# EAGLE board ESP8266Ring (EAGLE 8.3.2)
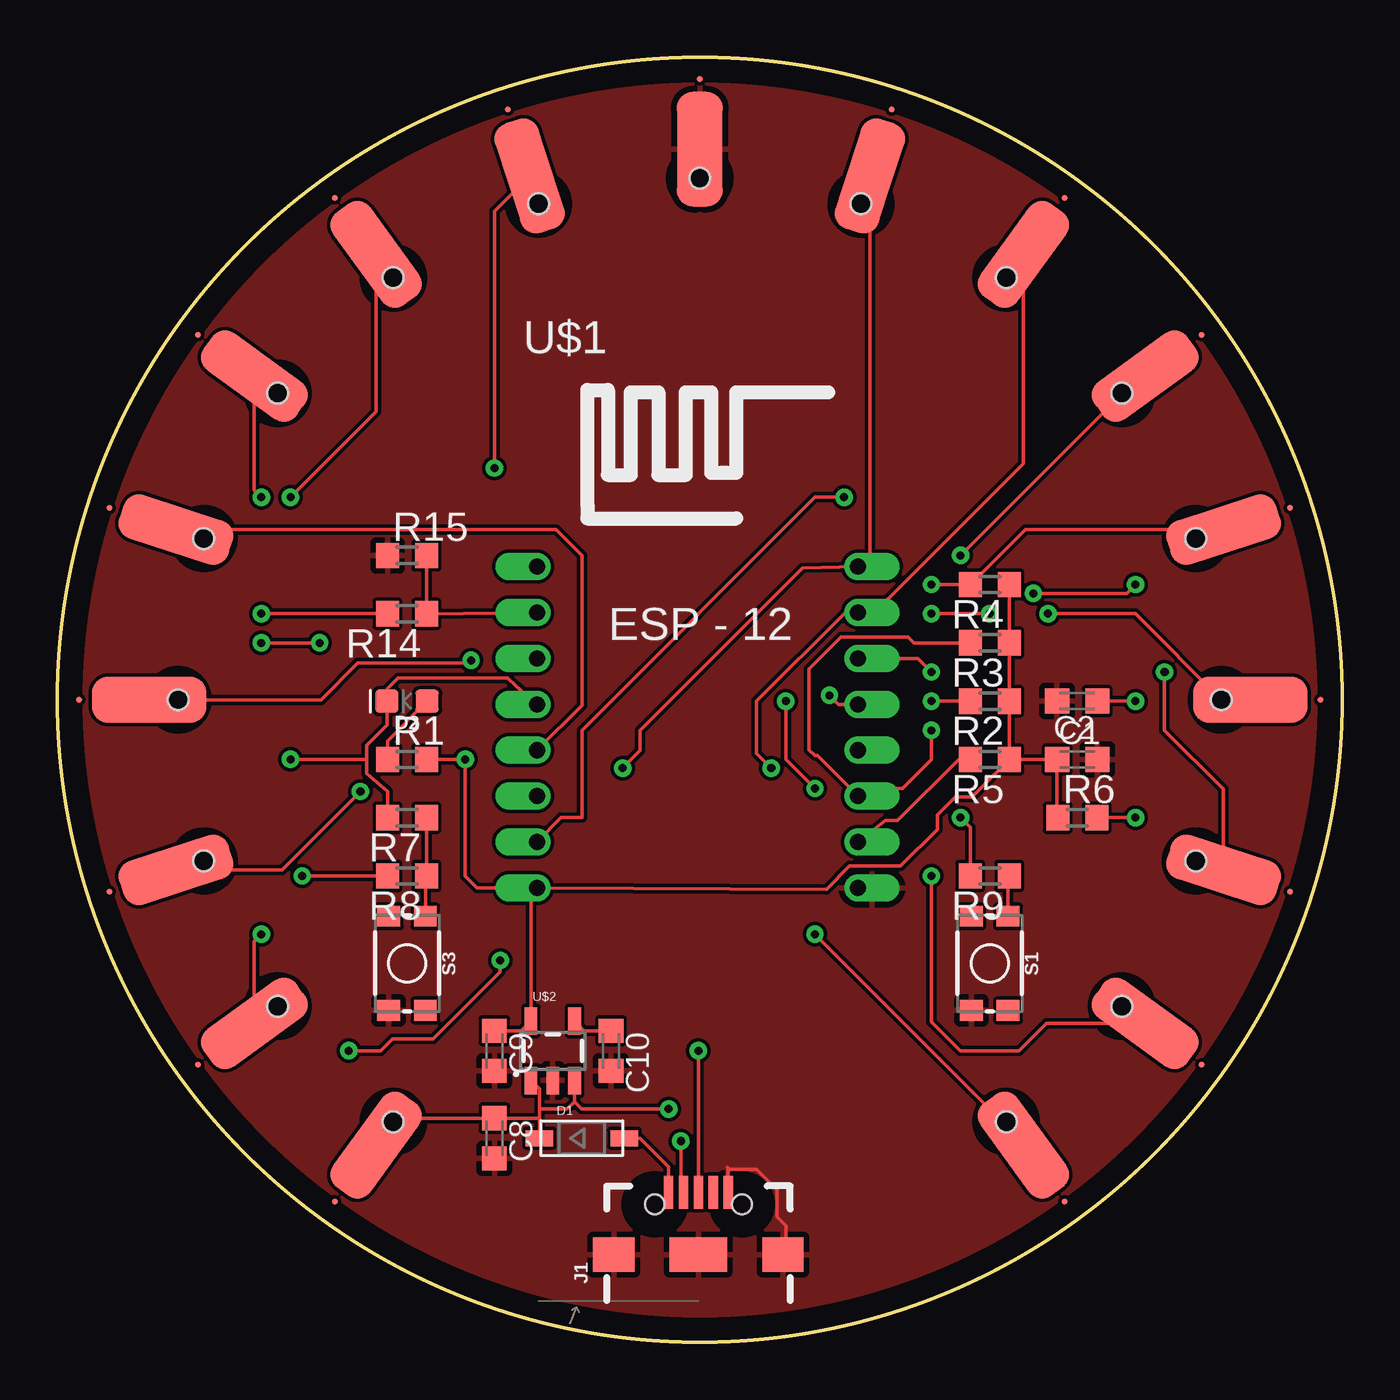
[diagram p0: board, top side]
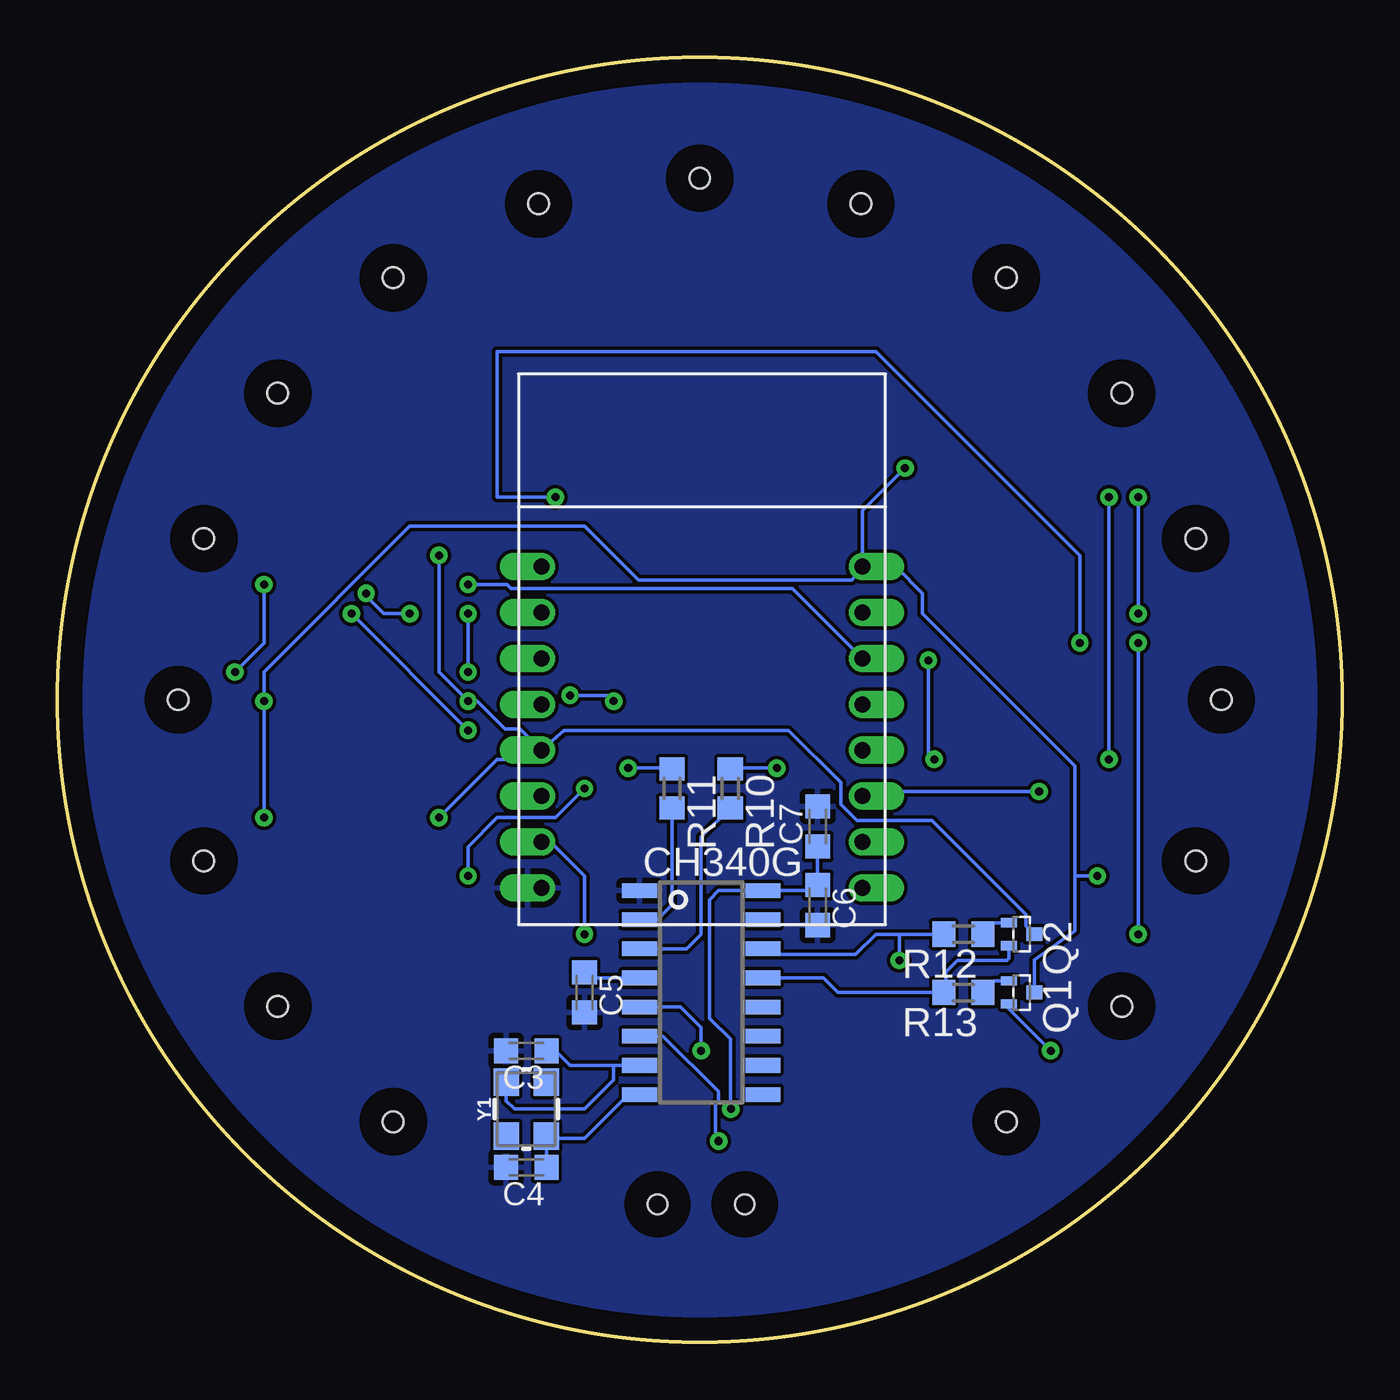
[diagram p1: board, bottom side, seen from below]

Size 56 x 56 mm. Coordinates in mm from the lower left corner, seen from the top.
Outline: circle at 28,28 radius 28
Copper layers (1*16): Top 0.035mm / dielectric 1.5mm / Bottom 0.035mm
Design rules "default *": minimum track width 6mil, minimum drill 0.35mm, track to track 6mil, track to pad 6mil, pad to pad 6mil, via to via 6mil, smd to smd 6mil, copper to edge 40mil, drill to drill 6mil, minimum pad ring 10mil, minimum via ring 8mil, stop-mask expansion 4mil, vias tented up to drill 0mil, thermal gap 10mil

## Footprints (pad centres in the part's own frame; a part is rotated, then mirrored left to right if it is on the bottom)
C0603K = smd 1.05 x 1.08: 1 -0.875,0; 2 0.875,0
SOD-123 = smd 1.2 x 0.7: A 1.85,0; C -1.85,0
LED-0603 = smd 1 x 1: A -0.877,0; C 0.877,0
USB-B-MICRO-SMD_RED_PASTE = smd 1.45 x 0.4: D+ 2.725,0; D- 2.725,0.65; GND 2.725,-1.3; ID 2.725,-0.65; VBUS 2.725,1.3 | smd 1.5 x 1.8: SHIELD1 0,3.685; SHIELD2 0,-3.685 | smd 1.5 x 2.5: SHIELD3 0,0 | hole 0.85: 2.2,1.9; 2.2,-1.9
EMT3 = smd 0.4 x 0.7: B -0.5,-0.55; E 0.5,-0.55 | smd 0.6 x 0.7: C 0,0.55
R0603 = smd 1 x 1.1: 1 -0.85,0; 2 0.85,0
TACTILE_SWITCH_SMD_4.6X2.8MM = smd 0.9 x 1: 1 -2.05,-0.8; 2 2.05,-0.8; 3 2.05,0.8; 4 -2.05,0.8
ESP12 = drill 0.7 offset: ADC -7.1,3.8; CH_PD -7.1,1.8; GND 6.9,-8.2; GPIO0 6.9,-2.2; GPIO2 6.9,-4.2; GPIO4 6.9,1.8; GPIO5 6.9,-0.2; GPIO12 -7.1,-4.2; GPIO13 -7.1,-6.2; GPIO14 -7.1,-2.2; GPIO15 6.9,-6.2; GPIO16 -7.1,-0.2; RESET -7.1,5.8; RX 6.9,3.8; TX 6.9,5.8; VCC -7.1,-8.2
SOT23-5 = smd 0.55 x 1.2: 1 -0.95,-1.3; 2 0,-1.3; 3 0.95,-1.3; 4 0.95,1.3; 5 -0.95,1.3
SOIC16 = smd 0.635 x 1.524: 1 -4.445,-2.695; 2 -3.175,-2.695; 3 -1.905,-2.695; 4 -0.635,-2.695; 5 0.635,-2.695; 6 1.905,-2.695; 7 3.175,-2.695; 8 4.445,-2.695; 9 4.445,2.695; 10 3.175,2.695; 11 1.905,2.695; 12 0.635,2.695; 13 -0.635,2.695; 14 -1.905,2.695; 15 -3.175,2.695; 16 -4.445,2.695
ROUNDPAD = smd 0.254 x 0.254: BP 0,-3.048 | smd 2 x 5: TP 0,0 | hole 0.9: 0,1.27
CRYSTAL-SMD-3.2X2.5MM = smd 1.2 x 1.1: 1 -1.175,-0.875; 2 1.175,-0.875; 3 1.175,0.875; 4 -1.175,0.875

## Placement (x,y rotation side)
C1  100uF  [C0603K]  44.45,25.4 0 top
C2  470pF  [C0603K]  44.45,27.94 180 top
C3  22pF  [C0603K]  35.56,12.7 180 bottom
C4  22pF  [C0603K]  35.56,7.62 180 bottom
C5  100nF  [C0603K]  33.02,15.24 270 bottom
C6  100nF  [C0603K]  22.86,19.05 270 bottom
C7  10nF  [C0603K]  22.86,22.48 90 bottom
C8  1uF  [C0603K]  19.05,8.89 270 top
C9  10uF  [C0603K]  19.05,12.7 270 top
C10  470pF  [C0603K]  24.13,12.7 270 top
D1  [SOD-123]  22.86,8.89 0 top
D2  BLUE  [LED-0603]  15.24,27.94 180 top
J1  [USB-B-MICRO-SMD_RED_PASTE]  27.94,3.81 90 top
Q1  2SC4726TL  [EMT3]  13.97,15.24 270 bottom
Q2  2SC4726TL  [EMT3]  13.97,17.78 270 bottom
R1  [R0603]  15.24,25.4 0 top
R2  12K  [R0603]  40.64,27.94 180 top
R3  12K  [R0603]  40.64,30.48 180 top
R4  12K  [R0603]  40.64,33.02 180 top
R5  12K  [R0603]  40.64,25.4 180 top
R6  12k  [R0603]  44.45,22.86 0 top
R7  470  [R0603]  15.24,22.86 180 top
R8  0  [R0603]  15.24,20.32 180 top
R9  470  [R0603]  40.64,20.32 180 top
R10  470  [R0603]  26.67,24.13 270 bottom
R11  470  [R0603]  29.21,24.13 270 bottom
R12  12K  [R0603]  16.51,17.78 180 bottom
R13  12K  [R0603]  16.51,15.24 180 bottom
R14  220K(1%)  [R0603]  15.24,31.75 180 top
R15  100K(1%)  [R0603]  15.24,34.29 0 top
S1  [TACTILE_SWITCH_SMD_4.6X2.8MM]  40.64,16.51 270 top
S3  [TACTILE_SWITCH_SMD_4.6X2.8MM]  15.24,16.51 270 top
U$1  ESP12  [ESP12]  28,28 0 top
U$2  SPX3819M5_3_3  [SOT23-5]  21.59,12.7 0 top
U$3  CH340G  [SOIC16]  27.94,15.24 270 bottom
U$4  ROUNDPADROUNDPAD  [ROUNDPAD]  47.42,42.11 126 top
U$5  ROUNDPADROUNDPAD  [ROUNDPAD]  52,28 90 top
U$6  ROUNDPADROUNDPAD  [ROUNDPAD]  50.83,20.58 72 top
U$7  ROUNDPADROUNDPAD  [ROUNDPAD]  47.42,13.89 54 top
U$8  ROUNDPADROUNDPAD  [ROUNDPAD]  5.17,20.58 288 top
U$9  ROUNDPADROUNDPAD  [ROUNDPAD]  8.58,13.89 306 top
U$10  ROUNDPADROUNDPAD  [ROUNDPAD]  5.17,35.42 252 top
U$11  ROUNDPADROUNDPAD  [ROUNDPAD]  13.89,47.42 216 top
U$12  ROUNDPADROUNDPAD  [ROUNDPAD]  35.42,50.83 162 top
U$13  ROUNDPADROUNDPAD  [ROUNDPAD]  42.11,47.42 144 top
U$14  ROUNDPADROUNDPAD  [ROUNDPAD]  8.58,42.11 234 top
U$15  ROUNDPADROUNDPAD  [ROUNDPAD]  50.83,35.42 108 top
U$16  ROUNDPADROUNDPAD  [ROUNDPAD]  42.11,8.58 36 top
U$17  ROUNDPADROUNDPAD  [ROUNDPAD]  28,52 180 top
U$18  ROUNDPADROUNDPAD  [ROUNDPAD]  4,28 270 top
U$19  ROUNDPADROUNDPAD  [ROUNDPAD]  20.58,50.83 198 top
U$20  ROUNDPADROUNDPAD  [ROUNDPAD]  13.89,8.58 324 top
Y1  12MHz  [CRYSTAL-SMD-3.2X2.5MM]  35.56,10.16 90 bottom

## Library data of the parts
C1-C10 R1-R15 = resistor
D1 = adafruit
D2 = SparkFun-LED; PROD_ID: DIO-08575
J1 = SparkFun-Connectors; PROD_ID: CONN-11752
Q1 Q2 = transistor-small-signal
S1 S3 = SparkFun-Switches; PROD_ID: SWCH-13065
U$1 = esp8266modules
U$2 = SparkFun-IC-Power; PROD_ID: VREG-13321
U$3 = ch340g
U$4-U$20 = RoundPad
Y1 = SparkFun-Clocks

## Nets
3.3V: C1.1 C9.1 R1.2 R2.1 R3.1 R4.1 R5.1 R6.1 U$1.VCC U$2.5 U$18.TP
5V: C6.1 C7.1 C8.1 D1.C U$2.1 U$2.3 U$3.16 U$20.TP
ADC: R14.1 R15.2 U$1.ADC
ADC_EX: R14.2 U$14.TP
EN: R4.2 U$1.CH_PD U$15.TP
GND: C1.2 C2.2 C3.2 C4.2 C5.2 C6.2 C7.2 C8.2 C9.2 C10.2 J1.GND J1.SHIELD1 J1.SHIELD2 J1.SHIELD3 R15.1 S1.2 S3.2 U$1.GND U$2.2 U$3.1 U$17.TP
GPIO0: Q2.C R2.2 R9.2 U$1.GPIO0 U$4.TP
GPIO2: R3.2 U$1.GPIO2 U$5.TP
GPIO4: U$1.GPIO4 U$6.TP
GPIO5: U$1.GPIO5 U$7.TP
GPIO12: U$1.GPIO12 U$8.TP
GPIO13: U$1.GPIO13 U$9.TP
GPIO14: U$1.GPIO14 U$10.TP
GPIO15: R5.2 U$1.GPIO15 U$16.TP
GPIO16: D2.C R7.2 U$1.GPIO16 U$11.TP
N$1: D2.A R1.1
N$2: R9.1 S1.4
N$3: R7.1 R8.1 S3.4
N$4: J1.D- U$3.6
N$5: J1.D+ U$3.5
N$6: R10.2 U$3.3
N$7: R11.2 U$3.2
N$8: C5.1 U$3.4
N$9: Q1.B R13.1
N$10: Q2.B R12.1
N$11: Q2.E R13.2 U$3.13
N$12: Q1.E R12.2 U$3.14
N$13: C10.1 U$2.4
NRST: C2.1 Q1.C R6.2 R8.2 U$1.RESET U$19.TP
RXD0: R11.1 U$1.RX U$13.TP
TXD0: R10.1 U$1.TX U$12.TP
VDDUSB: D1.A J1.VBUS
XI: C3.1 U$3.7 Y1.3
XO: C4.1 U$3.8 Y1.1

## Tracks (layer width: path | path; a pad name or v marks a point on that pad's centre or on a via)
3.3V  (via drill 0.35)
  Top 0.152: C9.1 20.21,13.57 U$2.5 20.64,19.54 U$1.VCC | R5.1 39.86,23.77 39.15,23.77 38.35,22.98 38.35,22.35 36.75,20.75 34.53,20.75 33.52,19.74 U$1.VCC | R5.1 C1.1 43.58,22.89 R6.1 | R5.1 R2.1 R3.1 R4.1 | U$18.TP 11.49,28 13.08,29.59 18.03,29.59 v18.03,29.72 | R1.2 v17.78,25.4 17.78,20.32 18.3,19.8 U$1.VCC
  Bottom 0.152: v18.03,29.72 18.03,25.65 v17.78,25.4
5V  (via drill 0.35)
  Top 0.152: 21.01,9.78 D1.C | 21.01,10.16 21.01,9.78 | 21.01,10.16 21.01,11.03 U$2.1 | 21.01,9.78 21,9.77 C8.1 15.07,9.77 U$20.TP | 22.54,10.47 U$2.3 | 22.54,10.47 22.23,10.16 21.01,10.16 | v26.65,10.16 22.86,10.16 22.54,10.47
  Bottom 0.152: C7.1 C6.1 23.1,19.68 U$3.16 27.18,19.68 27.58,19.28 27.58,14.12 26.67,13.21 26.67,10.16 v26.65,10.16
ADC
  Top 0.152: U$1.ADC R14.1 R15.2
ADC_EX  (via drill 0.35)
  Top 0.152: U$14.TP 8.58,37.14 v8.89,36.83 | v8.89,31.75 R14.2
  Bottom 0.152: v8.89,36.83 v8.89,31.75
EN  (via drill 0.35)
  Top 0.152: v38.1,33.02 R4.2 42.19,35.42 U$15.TP
  Bottom 0.152: v38.1,33.02 36.4,33.02 36.23,32.86 23.96,32.86 U$1.CH_PD
GND
  Top 0.152: J1.GND 29.24,7.59 | 29.24,7.59 29.21,7.62 | 29.24,7.59 29.3,7.53 30.47,7.53 31.36,6.64 31.36,5.47 31.75,5.08 31.75,3.94 J1.SHIELD2
  pour Top: 0,55.88 55.88,55.88 55.88,0 0,0
  pour Bottom: 0,0 55.88,0 55.88,55.88 0,55.88
GPIO0  (via drill 0.35)
  Top 0.152: R9.2 39.79,22.44 v39.37,22.86 | R2.2 v38.1,27.94 | U$4.TP 47.19,42.11 v39.37,34.29
  Bottom 0.152: Q2.C 13.79,18.15 13.79,18.64 17.88,22.73 21.15,22.73 21.85,23.43 21.85,24.39 24.13,26.67 33.91,26.67 U$1.GPIO0 | v39.37,22.86 36.83,25.4 35.18,25.4 U$1.GPIO0 | U$1.GPIO0 35.83,26.73 36.49,26.73 37.7,27.94 v38.1,27.94 39.37,29.21 v39.37,34.29
GPIO2  (via drill 0.35)
  Top 0.152: U$5.TP 50.74,28 46.99,31.75 v43.18,31.75 | v38.1,26.67 38.1,25.4 36.83,24.13 35.23,24.13 U$1.GPIO2 33.14,25.56 33.02,25.56 32.77,25.81 32.77,29.34 34.16,30.73 37.08,30.73 37.34,30.48 R3.2
  Bottom 0.152: v43.18,31.75 v38.1,26.67
GPIO4  (via drill 0.35)
  Top 0.152: U$1.GPIO4 37.51,29.8 v38.1,29.21 | v38.1,31.75 v40.64,31.75 | v42.55,32.64 46.61,32.64 v46.99,33.02 | U$6.TP 50.83,24.11 48.26,26.67 v48.26,29.21
  Bottom 0.152: v38.1,29.21 v38.1,31.75 | v40.64,31.75 41.78,31.75 42.55,32.51 v42.55,32.64 | v46.99,33.02 46.99,30.48 v48.26,29.21
GPIO5  (via drill 0.35)
  Top 0.152: U$7.TP 43.1,13.89 41.91,12.7 39.37,12.7 38.1,13.97 v38.1,20.32 | U$1.GPIO5 34.05,27.8 v33.66,28.19 | v31.75,27.94 31.75,25.4 v33.02,24.13
  Bottom 0.152: v33.66,28.19 32,28.19 v31.75,27.94 | v38.1,20.32 38.1,21.59 36.83,22.86 34.29,22.86 v33.02,24.13
GPIO12  (via drill 0.35)
  Top 0.152: U$8.TP 9.79,20.58 v13.21,24
  Bottom 0.152: v13.21,24 20.7,24 U$1.GPIO12
GPIO13  (via drill 0.35)
  Top 0.152: U$9.TP 8.58,17.47 v8.89,17.78 | v34.29,36.83 33.02,36.83 22.86,26.67 22.86,22.86 21.96,22.86 U$1.GPIO13 | v11.43,30.48 v8.89,30.48
  Bottom 0.152: v11.43,30.48 11.43,34.29 20.32,43.18 36.83,43.18 36.83,36.83 v34.29,36.83 | v8.89,30.48 v8.89,17.78
GPIO14
  Top 0.152: U$10.TP 21.73,35.42 22.86,34.29 22.86,27.76 U$1.GPIO14
GPIO15  (via drill 0.35)
  Top 0.152: U$1.GPIO15 36.08,22.73 36.62,22.73 39.29,25.4 R5.2 | U$16.TP 42.11,8.69 v33.02,17.78
  Bottom 0.152: U$1.GPIO15 34.5,21.8 33.02,20.32 v33.02,17.78
GPIO16  (via drill 0.35)
  Top 0.152: 13.48,25.4 13.48,24.79 14.39,24.01 R7.2 | 13.48,25.4 13.48,26.01 14.36,26.89 D2.C 14.36,28.46 14.86,28.96 19.62,28.96 19.99,28.59 U$1.GPIO16 | U$11.TP 13.89,40.56 v10.16,36.83 | v10.16,25.4 13.48,25.4
  Bottom 0.152: v10.16,36.83 v10.16,25.4
N$1
  Top 0.152: R1.1 14.39,26.21 D2.A
N$2
  Top 0.152: S1.4 41.44,20.27 R9.1
N$3
  Top 0.152: S3.4 16.04,20.27 R8.1 R7.1
N$4  (via drill 0.35)
  Top 0.152: v27.18,8.76 27.18,7.02 27.29,6.91 J1.D-
  Bottom 0.152: U$3.6 29.59,13.34 27.18,10.92 27.18,10.54 27.3,10.41 27.3,8.89 v27.18,8.76
N$5  (via drill 0.35)
  Top 0.152: v27.94,12.7 J1.D+
  Bottom 0.152: U$3.5 28.83,14.61 27.94,13.72 v27.94,12.7
N$6
  Bottom 0.152: U$3.3 28.57,17.14 27.94,17.78 27.94,22.01 R10.2
N$7
  Bottom 0.152: U$3.2 29.84,18.41 29.21,19.05 R11.2
N$8
  Bottom 0.152: U$3.4 32.78,15.88 C5.1
N$9
  Bottom 0.152: Q1.B 15.16,15.74 R13.1
N$10
  Bottom 0.152: Q2.B 15.16,18.28 R12.1
N$11
  Bottom 0.152: U$3.13 22.61,15.88 21.97,15.24 R13.2 17.27,15.33 17.27,16.13 16.76,16.64 14.61,16.64 14.52,16.72 Q2.E
N$12  (via drill 0.35)
  Top 0.152: v12.7,12.7 14.1,12.7 14.61,13.21 16.38,13.21 19.3,16.13 v19.3,16.64
  Bottom 0.152: 19.3,17.78 R12.2 | 19.3,17.78 20.32,17.78 21.21,16.89 24.99,16.89 U$3.14 | Q1.E 14.52,14.52 v12.7,12.7 | v19.3,16.64 19.3,17.78
N$13
  Top 0.152: C10.1 22.96,13.57 U$2.4
NRST  (via drill 0.35)
  Top 0.152: R8.2 v10.67,20.32 | R6.2 v46.99,22.86 | C2.1 v46.99,27.94 | v19.05,38.1 19.05,49.29 U$19.TP
  Bottom 0.152: Q1.C 13.42,16.66 11.65,17.93 11.65,20.32 | v10.67,20.32 11.65,20.32 | v46.99,22.86 v46.99,27.94 46.99,29.21 40.64,35.56 33.02,35.56 30.67,33.21 21.37,33.21 U$1.RESET | U$1.RESET 20.9,36.25 v19.05,38.1 | U$1.RESET 20.88,33.78 19.43,33.78 18.29,32.64 18.29,31.75 11.65,25.11 11.65,20.32
RXD0  (via drill 0.35)
  Top 0.152: v31.11,25.02 30.48,25.65 30.48,27.94 34.28,31.74 34.29,31.74 34.35,31.8 U$1.RX 35.61,31.8 42.11,38.3 U$13.TP
  Bottom 0.152: v31.11,25.02 29.25,25.02 R11.1
TXD0  (via drill 0.35)
  Top 0.152: v24.64,25.02 25.4,25.78 25.4,26.67 32.47,33.74 U$1.TX 35.42,34.32 U$12.TP
  Bottom 0.152: v24.64,25.02 26.63,25.02 R10.1
VDDUSB
  Top 0.152: J1.VBUS 26.64,7.65 25.4,8.89 D1.A
XI
  Bottom 0.152: 31.75,12.06 U$3.7 | 31.75,12.06 33.66,12.06 34.29,12.7 C3.1 | Y1.3 36.44,10.53 36.07,10.16 33.02,10.16 31.75,11.43 31.75,12.06
XO
  Bottom 0.152: U$3.8 31.11,10.79 33.02,8.89 34.59,8.89 Y1.1 C4.1